# EAGLE board MainPCB (EAGLE 9.5.2)

Size 60 x 75 mm. Coordinates in mm from the lower left corner, seen from the top.
Outline: 0,15 10,15 10,35 0,35 0,61 14,75 46,75 60,61 60,35 50,35 50,15 60,15 60,0 0,0 0,15
Copper layers (1*16): Top 0.035mm / dielectric 1.5mm / Bottom 0.035mm
Design rules "default": minimum track width 6mil, minimum drill 0.35mm, track to track 6mil, track to pad 6mil, pad to pad 6mil, via to via 6mil, smd to smd 6mil, copper to edge 40mil, drill to drill 6mil, minimum pad ring 10mil, minimum via ring 8mil, stop-mask expansion 4mil, vias tented up to drill 0mil, thermal gap 10mil

## Footprints (pad centres in the part's own frame; a part is rotated, then mirrored left to right if it is on the bottom)
C0402 = smd 0.7 x 0.9: 1 -0.65,0; 2 0.65,0
C0603 = smd 1.1 x 1: 1 -0.85,0; 2 0.85,0
SOT223 = smd 1.5 x 2: 1 -2.3,-3.15; 2 0,-3.15; 3 2.3,-3.15 | smd 3.8 x 2: 4 0,3.15
DEANS = drill 1.27 pad 3.556 long: + 0,0; - 0.737,-6.921
TSOP-6.PAC = smd 0.508 x 0.7: 1 -0.95,-1.163; 2 0,-1.163; 3 0.95,-1.163; 4 0.95,1.163; 5 0,1.163; 6 -0.95,1.163
R0402 = smd 0.6 x 0.7: 1 -0.5,0; 2 0.5,0

## Placement (x,y rotation side)
C1  0.1uF  [C0402]  -27.94,27.94 0 top  (outside the outline)
C2  1uF  [C0603]  -22.86,35.56 0 top  (outside the outline)
C3  0.1uF  [C0402]  -34.29,27.94 0 top  (outside the outline)
C4  1uF  [C0603]  -27.94,35.56 0 top  (outside the outline)
C5  0.1uF  [C0402]  -40.64,27.94 0 top  (outside the outline)
C6  1uF  [C0603]  -33.02,35.56 0 top  (outside the outline)
C7  4.7uF  [C0402]  -17.78,35.56 0 top  (outside the outline)
C8  1uF  [C0402]  -38.1,35.56 0 top  (outside the outline)
IC1  LM317MBSTT3  [SOT223]  -33.02,5.08 0 top  (outside the outline)
IC2  LM317MBSTT3  [SOT223]  -24.13,20.32 0 top  (outside the outline)
IC3  LM317MBSTT3  [SOT223]  -39.37,20.32 0 top  (outside the outline)
J1  [DEANS]  -17.78,11.43 0 top  (outside the outline)
Q1  SI3481DV  [TSOP-6.PAC]  -20.32,29.21 0 top  (outside the outline)
R1  3K3  [R0402]  -43.18,35.56 0 top  (outside the outline)
R2  9K1  [R0402]  -16.51,40.64 0 top  (outside the outline)
R3  2K2  [R0402]  -21.59,40.64 0 top  (outside the outline)
R4  2K7  [R0402]  -26.67,40.64 0 top  (outside the outline)
R5  1K2  [R0402]  -31.75,40.64 0 top  (outside the outline)
R6  1K8  [R0402]  -36.83,40.64 0 top  (outside the outline)
R7  2K4  [R0402]  -41.91,40.64 0 top  (outside the outline)
R8  9K1  [R0402]  -16.51,45.72 0 top  (outside the outline)

## Library data of the parts
C1-C8 = rcl; SPICEPREFIX: C
IC1-IC3 = v-reg; PARTNUMBER: LM317M
J1 = Kell Ideas; SF_ID: PRT-11864
Q1 = transistor-power
R1-R8 = rcl; SPICEPREFIX: R

## Nets
7V4_UNSAFE: J1.+ Q1.4
+5V: C2.1 C4.1 C6.1 IC1.4 IC2.4 IC3.4 R3.2 R5.2 R7.2
+7V4: C1.1 C3.1 C5.1 C7.1 C8.1 IC1.3 IC2.3 IC3.3 Q1.1 Q1.2 Q1.5 Q1.6 R1.2
BATT_MEAS: R1.1 R2.2
GND: C1.2 C2.2 C3.2 C4.2 C5.2 C6.2 C7.2 C8.2 J1.- Q1.3 R2.1 R4.1 R6.1 R8.1
N$1: IC1.1 R3.1 R4.2
N$2: IC2.1 R5.1 R6.2
N$3: IC3.1 R7.1 R8.2

## Tracks (layer width: path | path; a pad name or v marks a point on that pad's centre or on a via)
7V4_UNSAFE  (1 unrouted)
+5V  (8 unrouted)
+7V4  (9 unrouted)
BATT_MEAS  (1 unrouted)
GND  (13 unrouted)
N$1  (2 unrouted)
N$2  (2 unrouted)
N$3  (2 unrouted)